# Altium PCB main.PcbDoc
Units mil, origin at the board's own origin, x right, y up, seen from the top; angles counter-clockwise.
Board outline 2150 x 1520 mil, 2 copper layers (Top Layer, Bottom Layer); 42 components, 41 nets, 162 pads, 210 vias.
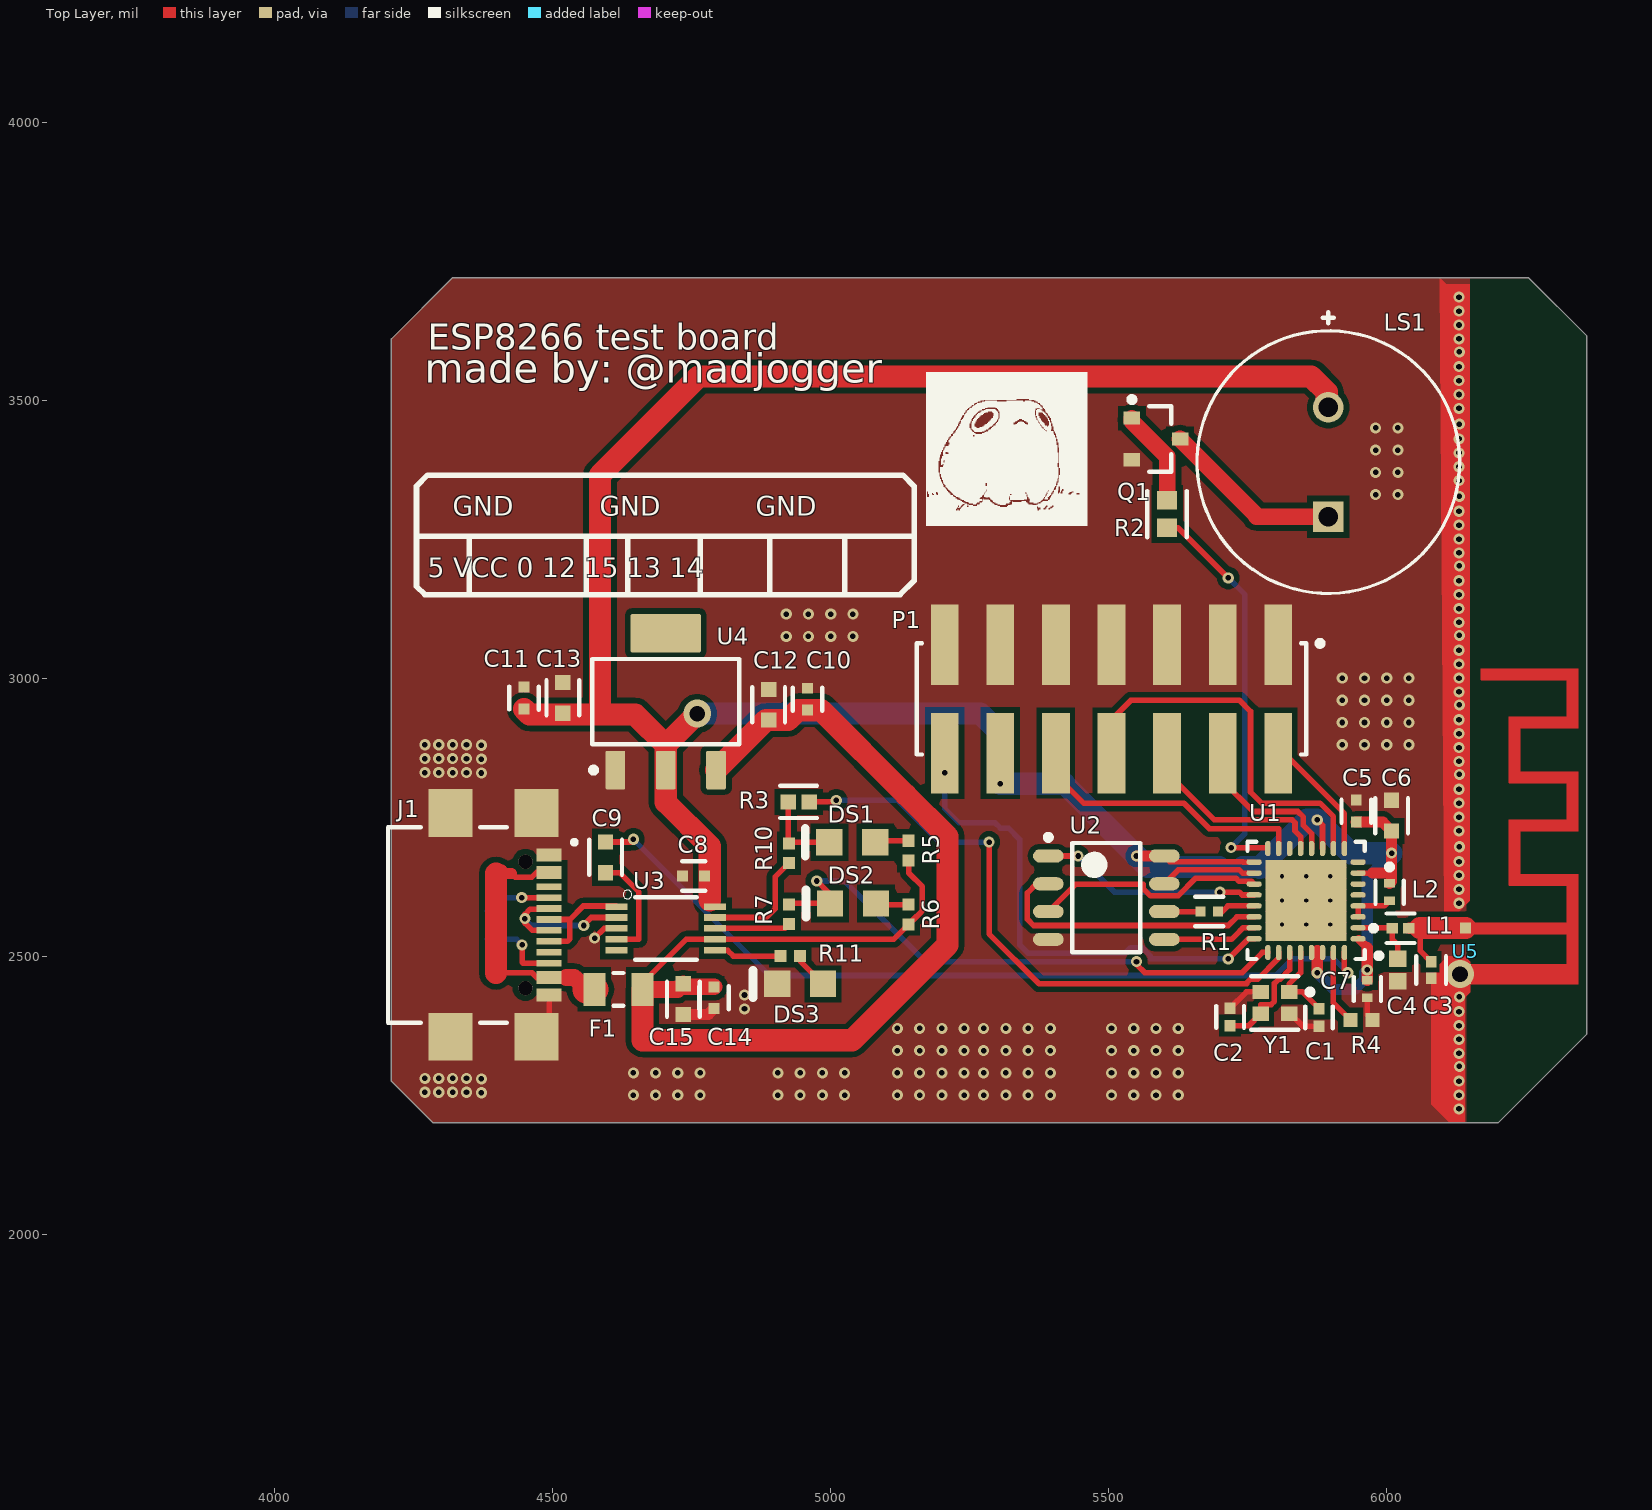
[diagram p0: Top Layer view]
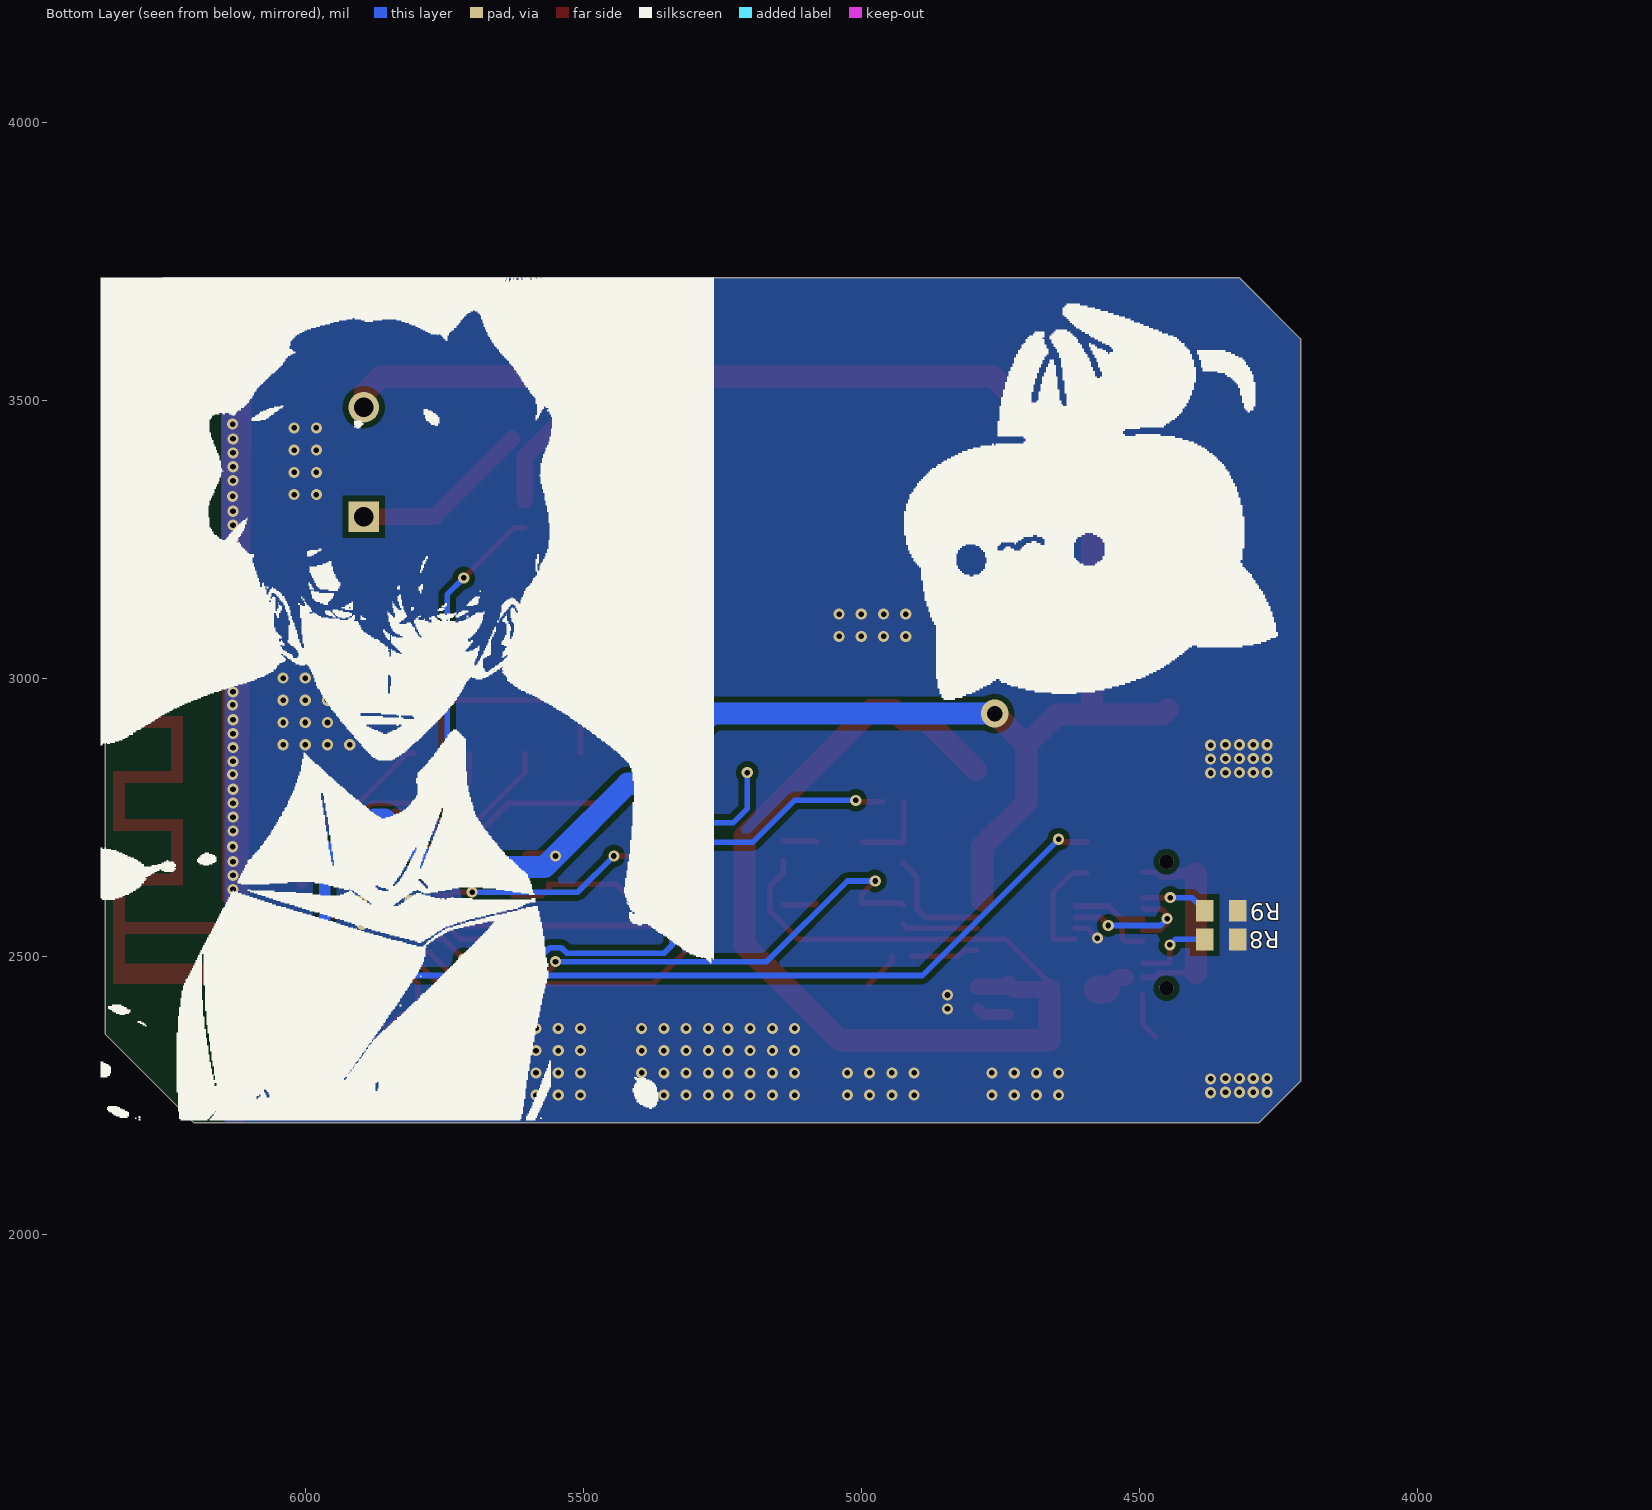
[diagram p1: Bottom Layer view, seen from below]
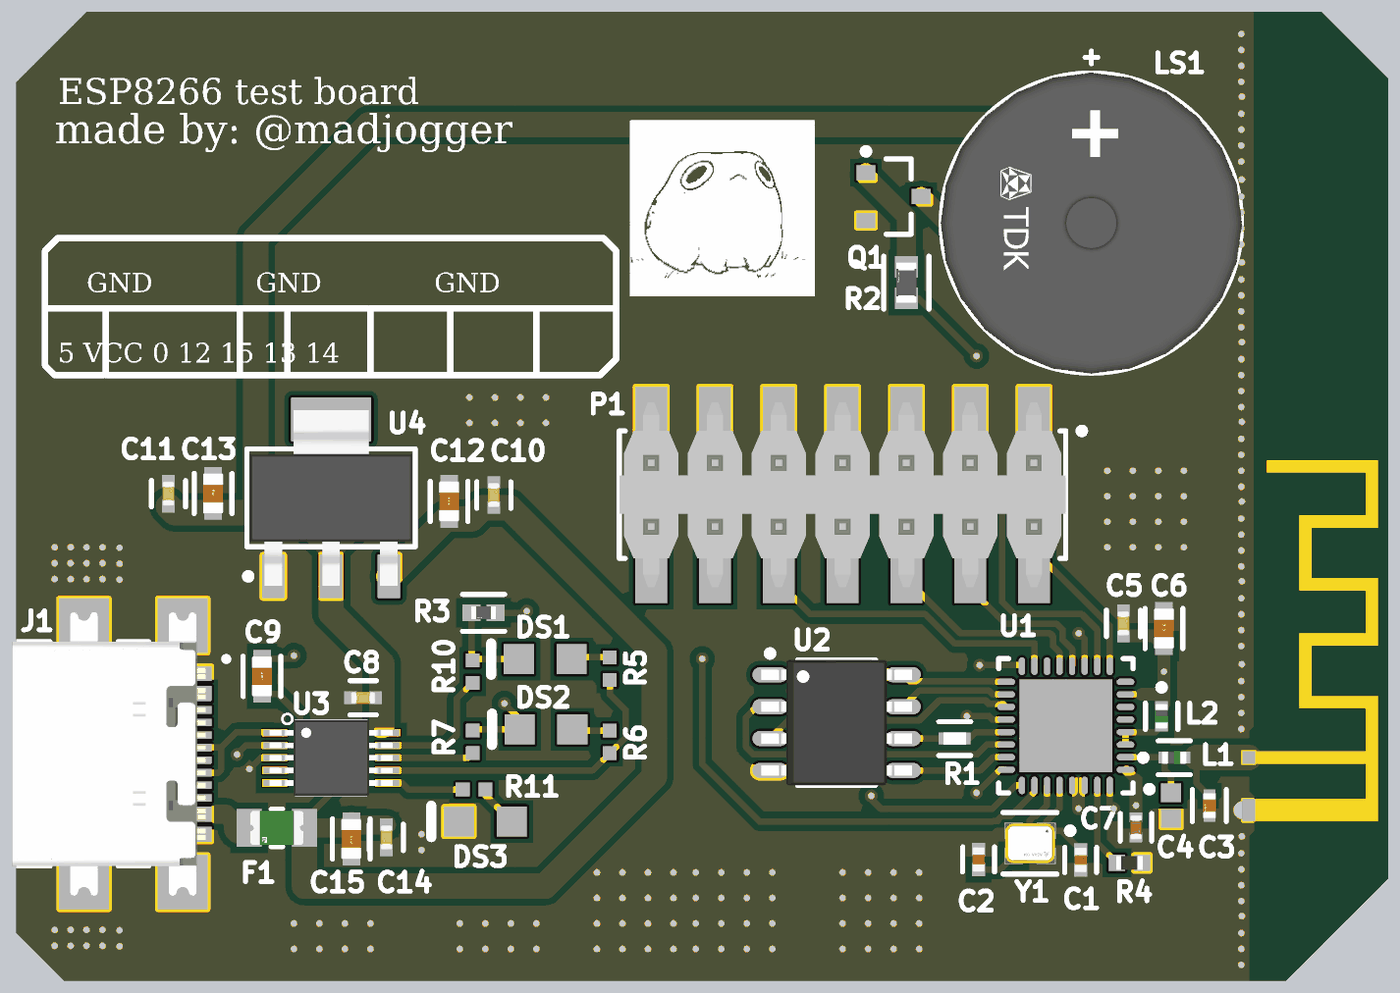
[diagram p2: 3D render of the assembled board from above, using the file's embedded part models]

## Layer stack, top to bottom
Top Solder: solder mask 0.4, Solder Resist, Dk 3.5
Top Layer: signal copper 1.4
Dielectric 1: dielectric 12.6, FR-4, Dk 4.8
Bottom Layer: signal copper 1.4
Bottom Solder: solder mask 0.4, Solder Resist, Dk 3.5

## Board outline
4210,2275 4285,2200 6200,2200 6360,2360 6360,3615 6255,3720 4320,3720 4210,3610

## Design rules (kind name [scope] priority, off if disabled: settings)
Clearance [All] p1: gap=10 ignorepadtopadclearanceinfootprint=FALSE except(5: Arc-Arc Arc-Track Arc-SMDPad Arc-THPad Track-Track Track-SMDPad Track-THPad SMDPad-SMDPad SMDPad-THPad THPad-THPad)
PlaneConnect [All] p1: planeconnectstyle=Direct reliefexpansion=20 reliefentries=4 reliefconductorwidth=10 reliefairgap=10
PolygonConnect [All] p1: connectstyle=Direct reliefconductorwidth=10 reliefentries=4 polygonreliefangle="90 Angle" airgapwidth=10
RoutingVias [All] p1: holewidth=28 width=50 viastyle="Through Hole" minholewidth=8 minwidth=10 maxholewidth=28 maxwidth=50
SolderMaskExpansion [All] p1: expansion=4 istentingtop=FALSE
Width [All] p1: maxlimit=80 minlimit=10 preferedwidth=10
29 further rules are at their usual default settings.

## Components (designator, comment, footprint, x,y, rotation, side; value= is the part's Value field where it differs from the comment)
C1 "C0402C689C5GACTU" FP-C0402-BB-MFG 5878.23,2389.66 r90 top value="6.8 pF"
C2 "C0402C689C5GACTU" FP-C0402-BB-MFG 5718.23,2390.41 r270 top value="6.8 pF"
C3 "GJM1555C1H3R0BB01D" FP-GJM155-0_05-IPC_C 6080,2474.9 r270 top
C4 "2.4pF" CAPC1006X50X20ML10T10 6020,2474.92 r270 top
C5 "CC0402KRX7R9BB104" FP-CC0402-MFG 5945.16,2760.59 r90 top value="100 nF"
C6 "C1608X5R1A106K080AC" FP-C1608-080-0_1-MFG 6008.71,2752.58 r270 top
C7 "GRM155R61A105KE15D" FP-GRM15-0_1-MFG 5965,2440.75 r270 top value=1uF
C8 "CC0402KRX7R9BB104" FP-CC0402-MFG 4753.46,2643.95 r180 top value="100 nF"
C9 "C1608X5R1A106K080AC" FP-C1608-080-0_1-MFG 4595,2677.56 r270 top
C10 "CC0402KRX7R9BB104" FP-CC0402-MFG 4958.31,2961.97 r90 top value="100 nF"
C11 "CC0402KRX7R9BB104" FP-CC0402-MFG 4448.31,2964.1 r90 top value="100 nF"
C12 "C1608X5R1A106K080AC" FP-C1608-080-0_1-MFG 4888.31,2951.97 r270 top
C13 "C1608X5R1A106K080AC" FP-C1608-080-0_1-MFG 4518.31,2964.41 r270 top
C14 "CC0402KRX7R9BB104" FP-CC0402-MFG 4790,2425 r270 top value="100 nF"
C15 "C1608X5R1A106K080AC" FP-C1608-080-0_1-MFG 4735,2422.56 r90 top
DS1 "HSMG-C170" AVAG-HSMX-C170_V 5038.84,2704.65 r180 top
DS2 "HSMG-C170" AVAG-HSMX-C170_V 5040.18,2594.65 r180 top
DS3 "HSMG-C170" AVAG-HSMX-C170_V 4945,2450 r180 top
F1 "0805L050WR" FP-0805L-MFG 4618.31,2440 r180 top value=0.15-0.85Ω
J1 "USB4110GFA" GCT_USB4110GFA 4451.11,2555.94 r270 top
L1 "LQG15HN2N2S02D" FP-LQG15HH_02-IPC_C 6024.9,2550 r0 top
L2 "LQG15HN4N3S02D" FP-LQG15HH_02-MFG 6005,2615 r270 top
LS1 "SD1209T5-A1" FP-SD1209-MFG 5895,3388.43 r90 top
P1 "TSM-107-01-L-DV" SMTC-TSM-107-01-X-DV 5505,2962.44 r180 top
Q1 "BC847C" INF-SOT23_L 5585,3430 r0 top
R1 "CRCW0402200RFKED" FP-CRCW0402-e3-IPC_C 5680.83,2580 r0 top
R2 "ERA-3AEB102V" FP-ERA3A-IPC_C 5605,3295 r90 top
R3 "RC0402FR-07499RL" FP-RC0402-0_4-IPC_A 4942.32,2777.2 r180 top
R4 "ERJ-2RKF1202X" RESC1005X40X25ML05T05 5954.69,2385 r0 top
R5 "1K2" RESC1005X40X25NL05T05 5140.18,2689.65 r270 top
R6 "1K2" RESC1005X40X25NL05T05 5140.18,2574.65 r270 top
R7 "1K2" RESC1005X40X25NL05T05 4925,2575 r90 top
R8 "5K1" RESC1608X55X25ML10T15 4352.68,2530 r180 bottom
R9 "5K1" RESC1608X55X25ML10T15 4352.68,2581.53 r0 bottom
R10 "1K2" RESC1005X40X25NL05T05 4925,2685 r90 top
R11 "1K2" RESC1005X40X25NL05T05 4927.28,2500 r0 top
U1 "ESP8266EX" ESFS-QFN-32_L 5855,2600 r180 top
U2 "M95128-WMN6TP" STM-SO8N-8_V 5495.67,2605 r0 top
U3 "CH340E" MSOP10 4703.58,2549.68 r0 top
U4 "LM1117IMP-3.3/NOPB" DCY0004A_N 4703.31,2957.44 r90 top
U5 "2.4GHZ_ANTENNA" 2.4GHZ_ANTENNA 6271.64,2742.62 r270 top (schematic designator U1)
Y1 "ABM11-26.000MHZ-B7G-T" FP-ABM11-MFG 5798.82,2415.73 r180 top

## Footprints (in the part's own frame and the unit in brackets; to place one, negate y for a bottom-side part, rotate by r counter-clockwise, add the part's x,y. Pads: shape width x height; smd on the part's side, far side on the other; paste and mask are expansions set on the pad)
2.4GHZ_ANTENNA [mil]
  rect 19.68x19.68 smd paste+0 mask+2: ANT(192.32,-130)
  rect 35.43x19.68 smd paste+0 mask+2: GND(275,-130)
  Top Layer region: 202.16,-139.84 202.16,53.07 257.28,53.07 257.28,-139.84 292.71,-139.84 292.71,72.76 95.86,72.76 95.86,-31.18 17.12,-31.18 17.12,72.76 -89.18,72.76 -89.18,-31.18 -167.92,-31.18 -167.92,72.76 -274.21,72.76 -274.21,-102.04 -254.53,-102.04 -254.53,53.07 -187.6,53.07 -187.6,-50.86 -69.49,-50.86 -69.49,53.07 -2.56,53.07 -2.56,-50.86 115.55,-50.86 115.55,53.07 182.48,53.07 182.48,-139.84
  Top Layer lines w0.1: 292.71,-139.84 257.28,-139.84 257.28,53.07 202.16,53.07 202.16,-139.84 182.48,-139.84 182.48,53.07 115.55,53.07 115.55,-50.86 -2.56,-50.86 -2.56,53.07 -69.49,53.07 -69.49,-50.86 -187.6,-50.86 -187.6,53.07 -254.53,53.07 -254.53,-102.04 -274.21,-102.04 -274.21,72.76 -167.92,72.76 -167.92,-31.18 -89.18,-31.18 -89.18,72.76 17.12,72.76 17.12,-31.18 95.86,-31.18 95.86,72.76 292.71,72.76 292.71,-139.84
AVAG-HSMX-C170_V [mm] "SMD, 2-Leads, Body 2x1.25mm, Height 0.8mm"
  rect 1.2x1.2 smd: 1(-1.05,0) 2(1.05,0)
  silkscreen extent 2.15,-0.63 2.15,0.63, body extent -1,-0.63 1,0.63, height 0.8
CAPC1006X50X20ML10T10 [mm] "Chip Capacitor, 2-Leads, Body 1.00x0.55mm, IPC Low Density"
  rect 0.74x0.8 smd: 1(-0.51,0) 2(0.51,0)
  body extent -0.55,-0.33 0.55,0.32, height 0.5
DCY0004A_N [mm] "SOT223, 4-Leads, Body 6.7x3.7mm, Pitch 2.3mm, IPC Medium Density"
  rrect11% 1.75x0.9 smd: 1(-3.125,2.3) 2(-3.125,0) 3(-3.125,-2.3)
  rrect6% 1.75x3.2 smd: 4(3.125,0)
  silkscreen extent -3.25,-3.35 1.95,3.42, body extent -3.5,-3.25 3.5,3.25, height 1.62
ESFS-QFN-32_L [mm] "QFN, 32-Leads, Body 5.05x5.05mm, Pitch 0.50mm, Thermal Pad 3.70x3.70mm, IPC High Density"
  oval 0.7x0.25 smd: 1(-2.375,1.75) 2(-2.375,1.25) 3(-2.375,0.75) 4(-2.375,0.25) 5(-2.375,-0.25) 6(-2.375,-0.75) 7(-2.375,-1.25) 8(-2.375,-1.75) 17(2.375,-1.75) 18(2.375,-1.25) 19(2.375,-0.75) 20(2.375,-0.25) 21(2.375,0.25) 22(2.375,0.75) 23(2.375,1.25) 24(2.375,1.75)
  oval 0.25x0.7 smd: 9(-1.75,-2.375) 10(-1.25,-2.375) 11(-0.75,-2.375) 12(-0.25,-2.375) 13(0.25,-2.375) 14(0.75,-2.375) 15(1.25,-2.375) 16(1.75,-2.375) 25(1.75,2.375) 26(1.25,2.375) 27(0.75,2.375) 28(0.25,2.375) 29(-0.25,2.375) 30(-0.75,2.375) 31(-1.25,2.375) 32(-1.75,2.375)
  rect 3.7x3.7 smd: 33(0,0)
  silkscreen extent -3.45,-2.67 2.68,2.68, body extent -2.52,-2.52 2.53,2.53, height 0.9
FP-0805L-MFG [mm]
  rect 1x1.5 smd paste+0 mask+0: 1(-1.1,0) 2(1.1,0)
  silkscreen extent -0.23,-0.75 0.23,0.75, body extent -1.7,-0.85 1.7,0.85, height 0.25
FP-ABM11-MFG [mm]
  rect 0.75x0.65 smd paste+0 mask+0: 1(-0.65,-0.5) 2(0.65,-0.5) 3(0.65,0.5) 4(-0.65,0.5)
  silkscreen extent -1.73,-1.22 1.07,1.22, body extent -1.17,-0.97 1.17,0.97, height 0.25
FP-C0402-BB-MFG [mm]
  rect 0.52x0.52 smd paste+0 mask+0: 1(-0.4,0) 2(0.4,0)
  silkscreen extent -0.5,-0.64 0.5,0.64, body extent -0.8,-0.4 0.8,0.4, height 0.25
FP-C1608-080-0_1-MFG [mm]
  rect 0.7x0.7 smd paste+0 mask+0: 1(-0.7,0) 2(0.7,0)
  silkscreen extent -0.8,-0.75 0.8,0.75, body extent -1.15,-0.55 1.15,0.55, height 0.25
FP-CC0402-MFG [mm]
  rect 0.5x0.5 smd paste+0 mask+0: 1(-0.5,0) 2(0.5,0)
  silkscreen extent -0.53,-0.68 0.53,0.67, body extent -0.87,-0.48 0.87,0.48, height 0.25
FP-CRCW0402-e3-IPC_C [mil]
  rect 18.43x18.6 smd paste+0 mask+0: 1(-15.83,0) 2(15.83,0)
  silkscreen extent -25,-27 25,27, body extent -29,-15 29,15, height 10
FP-ERA3A-IPC_C [mil]
  rect 33.66x35.68 smd paste+0 mask+0: 1(-24.63,0) 2(24.63,0)
  silkscreen extent -41,-35 41,35, body extent -45,-24 45,24, height 10
FP-GJM155-0_05-IPC_C [mil]
  rect 20.29x18.6 smd paste+0 mask+0: 1(-14.9,0) 2(14.9,0)
  silkscreen extent -25,-27 25,27, body extent -29,-15 29,15, height 10
FP-GRM15-0_1-MFG [mm]
  rect 0.4x0.5 smd paste+0 mask+0: 1(-0.4,0) 2(0.4,0)
  silkscreen extent -0.55,-0.63 0.55,0.63, body extent -0.7,-0.38 0.7,0.38, height 0.25
FP-LQG15HH_02-IPC_C [mil]
  rect 20.29x18.6 smd paste+0 mask+0: 1(-14.9,0) 2(14.9,0)
  silkscreen extent -54,-27 25,27, body extent -29,-15 29,15, height 10
FP-LQG15HH_02-MFG [mm]
  rect 0.4x0.5 smd paste+0 mask+0: 1(-0.4,0) 2(0.4,0)
  silkscreen extent -1.27,-0.64 0.53,0.65, body extent -0.7,-0.38 0.7,0.38, height 0.25
FP-RC0402-0_4-IPC_A [mil]
  rect 28.16x26.48 smd paste+0 mask+0: 1(-18.84,0) 2(18.84,0)
  silkscreen extent -33,-29 33,29, body extent -41,-21 41,21, height 10
FP-SD1209-MFG [mm]
  rect 1.4x1.4 hole 0.9 paste-2539.97 mask+0: 1(-2.5,0)
  round 1.4 hole 0.9 paste-2539.97 mask+0: 2(2.5,0)
  silkscreen extent -6,-6 6.85,6, body extent -6.1,-6.1 6.1,6.1, height 0.25
GCT_USB4110GFA [mm]
  rect 0.6x1.15 smd: A1/B12(-3.2,1.075) A4/B9(-2.4,1.075) B1/A12(3.2,1.075) B4/A9(2.4,1.075)
  rect 0.3x1.15 smd: A5(-1.25,1.075) A6(-0.25,1.075) A7(0.25,1.075) A8(1.25,1.075) B5(1.75,1.075) B6(0.75,1.075) B7(-0.75,1.075) B8(-1.75,1.075)
  rect 2.18x2 smd: S1(-5.11,0.5) S2(5.11,0.5) S3(-5.11,-3.43) S4(5.11,-3.43)
  round 0.65 hole 0.65 unplated: ""(-2.89,0) ""(2.89,0)
  silkscreen extent -4.47,-6.28 4.47,2.33, body extent -5.65,-6.28 5.65,1.42, height 3.26
INF-SOT23_L [mm] "SOT23, 3-Leads, Body 2.9x1.3 mm, Pitch 0.95 mm, IPC High Density"
  rect 0.75x0.6 smd: 1(-1.1,0.95) 2(-1.1,-0.95) 3(1.1,0)
  silkscreen extent -1.22,-1.5 0.7,1.92, body extent -0.7,-1.5 0.7,1.5, height 1.1
MSOP10 [mm]
  rect 1x0.3 smd paste-1 mask+0.05: 1(-2.25,1) 2(-2.25,0.5) 3(-2.25,0) 4(-2.25,-0.5) 5(-2.25,-1) 6(2.25,-1) 7(2.25,-0.5) 8(2.25,0) 9(2.25,0.5) 10(2.25,1)
  silkscreen extent -1.95,-1.43 1.4,1.75, body extent -2.45,-1.5 2.45,1.5, height 1
RESC1005X40X25ML05T05 [mm] "Chip Resistor, 2-Leads, Body 1.05x0.55mm, IPC Low Density"
  rect 0.65x0.65 smd: 1(-0.5,0) 2(0.5,0)
  body extent -0.53,-0.28 0.53,0.28, height 0.4
RESC1005X40X25NL05T05 [mm] "Chip Resistor, 2-Leads, Body 1.00x0.50mm, IPC Medium Density"
  rect 0.55x0.55 smd: 1(-0.45,0) 2(0.45,0)
  body extent -0.53,-0.27 0.53,0.28, height 0.4
RESC1608X55X25ML10T15 [mm] "Chip Resistor, 2-Leads, Body 1.60x0.80mm, IPC Low Density"
  rect 0.8x1 smd: 1(-0.75,0) 2(0.75,0)
  body extent -0.85,-0.45 0.85,0.45, height 0.55
SMTC-TSM-107-01-X-DV [mm] "Double Row Gullwing ASM, 2x7 Pins, Vertical, 2.54mm Pitch, Male"
  rect 1.27x3.68 smd: 1(-7.62,-2.475) 2(-7.62,2.475) 3(-5.08,-2.475) 4(-5.08,2.475) 5(-2.54,-2.475) 6(-2.54,2.475) 7(0,-2.475) 8(0,2.475) 9(2.54,-2.475) 10(2.54,2.475) 11(5.08,-2.475) 12(5.08,2.475) 13(7.62,-2.475) 14(7.62,2.475)
  silkscreen extent -9.65,-2.66 8.89,2.54, body extent -8.89,-3.68 8.89,3.68, height 9.65
STM-SO8N-8_V [mm] "SOIC, 8-Leads, Body 5x4mm, Pitch 1.27mm"
  oval 1.4x0.6 smd: 1(-2.65,1.905) 2(-2.65,0.635) 3(-2.65,-0.635) 4(-2.65,-1.905) 5(2.65,-1.905) 6(2.65,-0.635) 7(2.65,0.635) 8(2.65,1.905)
  silkscreen extent -2.77,-2.5 1.55,2.88, body extent -3,-2.5 3,2.5, height 1.75

## Part data
C1 C2: library part CMP-1034-00517-3, "CAP CER 6.8PF 50V NP0 0402", Capacitance="6.8 pF", Manufacturer=Kemet, Package=C0402-BB, Temperature="-55°C to +125°C", Temperature Characteristic=C0G, Temperature Coefficient=15%, Temperature Range High=+125°C, Temperature Range Low=-55°C, Tolerance="0.25 pF", Voltage Rating="50 V", Automotive=No, Category=Cap, ComponentLink2Description=Datasheet, ComponentLink2URL=https://content.kemet.com/datasheets/KEM_C1002_X7R_SMD.pdf, Device Class L1="Passive Components", Device Class L2=Capacitors, Device Class L3="Ceramic Capacitors", Digikey Description="CAP CER 6.8PF 50V NP0 0402", Height=0.55mm, Ipc Land Pattern Name=CAPC10050X50, Lead Free=Yes, Manufacturer Part Number=C0402C689C5GACTU, Material=Ceramic, Mouser Description="Cap Ceramic 6.8pF 50V C0G 0.25pF SMD 0402 125°C Paper T/R", Octopart=https://octopart.com/c0402c689c5gactu-kemet-9143567, RoHS=TRUE
C3: library part CMP-2008-03843-2, "Multi-Layer Ceramic Capacitor 3pF C0G  ±0.1pF 0402 Paper T/R", Capacitance=3pF, Case Code (Imperial)=0402, Case Code (Metric)=1005, Dielectric=C0G, Max Operating Temperature=125°C, Min Operating Temperature=-55°C, Package Quantity=1, Voltage=50V, Case/Package=0402, Depth=0.5mm, Height=0.5mm, Lead Free="Lead Free", Length=1mm, Mount="Surface Mount", Packaging="Tape and Reel", Radiation Hardening=No, REACH SVHC="No SVHC", Termination=SMD/SMT, Thickness=0.022inch, Voltage Rating=50V, Voltage Rating (DC)=50V, Width=0.02inch
C4: library part CMP-2008-04784-1, Manufacturer="AVX Interconnect / Elco", Part Number=04023J2R4BBSTR
C5 C8 C10 C11 C14: library part CMP-03422-001010-1, "CAP CER 0.1UF 50V X7R 0402", Capacitance="100 nF", Manufacturer=YAGEO, Package=CC0402, Temperature="-55°C to +125°C", Temperature Characteristic=X7R, Temperature Coefficient=30ppm/°C, Temperature Range High=+125°C, Temperature Range Low=-55°C, Tolerance=0.1, Voltage Rating="50 V", Automotive=No, Automotive Grade=NA, Category=Cap, ComponentLink2Description=Datasheet, ComponentLink2URL=http://www.yageo.com/documents/recent/UPY-GP_NP0_16V-to-50V_16.pdf, Device Class L1="Passive Components", Device Class L2=Capacitors, Device Class L3="Ceramic Capacitors", Digikey Description="CAP CER 0.1UF 50V X7R 0402", Footprint Url=http://www.yageo.com/exep/pages/download/literatures/UPY-C_GEN_24.pdf, Height=0.55mm, Ipc Land Pattern Name=CAPC10050X50, Lead Free=Yes, Manufacturer Part Number=CC0402KRX7R9BB104, Material=Ceramic, Octopart=https://octopart.com/cc0402krx7r9bb104-yageo-56536067, RoHS=TRUE
C6 C9 C12 C13 C15: library part CMP-2000-04979-3, "Multilayer Ceramic Capacitors 10μF ±10% 10V X5R SMD 0603", Capacitance=10uF, Case Code (Imperial)=0603, Case Code (Metric)=1608, Dielectric=X5R, Dielectric Material=Ceramic, Max Operating Temperature=85°C, Min Operating Temperature=-55°C, Package Quantity=1, Tolerance=10%, Voltage=10V, Case/Package=0603, Construction=Flat, Depth=0.8mm, Height=0.8mm, Lead Free="Lead Free", Length=1.6mm, Mount="Surface Mount", Number of Pins=2, Packaging="Tape and Reel", Radiation Hardening=No, REACH SVHC="No SVHC", Resistor Type=Ceramic, RoHS Compliant=Yes, Series=C, Termination=SMD/SMT, Thickness=0.035inch, Voltage Rating=10V, Voltage Rating (DC)=10V, Weight=7.1E-05oz, Width=0.8mm
C7: library part CMP-2008-04556-2, "CAP CER 1UF 10V X5R 0402", Capacitance=1uF, Manufacturer=Murata, Package=GRM15-0.1, Temperature="-55°C to +85°C", Temperature Characteristic=X5R, Temperature Coefficient=15%, Temperature Range High=+85°C, Temperature Range Low=-55°C, Tolerance=10%, Voltage Rating=10V, Automotive=No, Category=Cap, ComponentLink2Description=Datasheet, ComponentLink2URL=https://search.murata.co.jp/Ceramy/image/img/A01X/G101/ENG/GRM155R61A105KE15-01A.pdf, Device Class L1="Passive Components", Device Class L2=Capacitors, Device Class L3="Ceramic Capacitors", Digikey Description="CAP CER 1UF 10V X5R 0402", Height=0.55mm, Ipc Land Pattern Name=CAPC10050X50, Lead Free=Yes, Manufacturer Part Number=GRM155R61A105KE15D, Material=Ceramic, Mouser Description="0402 1 uF 10 V ±10% Tolerance X5R Surface Mount Multilayer Ceramic Capacitor", Octopart=https://octopart.com/grm155r61a105ke15d-murata-197442, RoHS=TRUE
DS1 DS2 DS3: library part CMP-2000-05062-1, "Chip LED, Green, 2.2 V, -40 to 85 degC, 2-Pin SMD, Pb-Free, Tape and Reel", Forward Current If=20mA, Forward Voltage=2.2V, Forward Voltage VF Max=2.6V, LED Colour=Green, Manufacturer=Avago, Operating Temperature Max=85degC, Operating Temperature Min=-30degC, Operating Temperature Range=-30degCto+85degC, Opto Case Style=SMD, Package Description="2-Pin Surface Mount Device, Body 2 x 1.25 mm, Height 0.8 mm", Package Reference=HSMX-C170, Storage Temperature Min=-40degC, Bulb Size=1.25mmx1.4mm, Datasheet URL=https://datasheet.ciiva.com/29280/180495-da-01-en-chip-led-hsmg-c170-gelb-gruen-29280971.pdf, Datasheet Version=Oct-08, Dominant Wavelength=572nm, Dominant Wavelength Typ=572nm, External Depth=0.8mm, External Length / Height=2mm, External Width=1.25mm, Forward Current If Max=20mA, LED Mounting=SMD, LED Type=Standard, Lens Shape=Rectangular, Light Area Height=1mm, Luminous Intensity=15mcd, Luminous Intensity Min=4mcd, Luminous Intensity Typ=15mcd, Manufacturer URL=http://www.avagotech.com/, Mounting Type=SMD, MSL=MSL2A-4weeks, No. of Pins=2, Opto Mounting Orientation=Top, Packaging=CutTape, Peak Forward Current=20mA, Peak Wavelength=570nm, PIV Max=5V, Storage Temperature Max=85degC, SVHC=NoSVHC(16-Jun-2014), Viewing Angle=170deg, Voltage Vf Typ=2.2V, Wavelength Typ=570nm
F1: library part CMP-08606-000023-1, "PTC RESET FUSE 6V 500MA 0805", Ambient Temperature Range High=+85°C, Ambient Temperature Range Low=-40°C, Current Rating=100A, Hold Current=0.5A, Manufacturer="Littelfuse Inc.", Package=0805L, Resistance=0.15-0.85Ω, Temperature="-40°C to +85°C", Trip Current=1A, Voltage Rating=6V, Automotive=No, Category=Fuse, ComponentLink2Description=Datasheet, ComponentLink2URL=https://www.littelfuse.com/~/media/electronics/datasheets/resettable_ptcs/littelfuse_ptc_0805l_datasheet.pdf.pdf, Device Class L1="Circuit Protection", Device Class L2="PTC Resettable Fuses", Device Class L3=unset, Digikey Description="PTC RESET FUSE 6V 500MA 0805", Height=1.25mm, Lead Free=Yes, Manufacturer Part Number=0805L050WR, Mouser Description="PTC Resettable Fuse 0.5A(hold) 1A(trip) 6VDC 100A 0.5W 0.1s 0.15Ohm SMD Solder Pad 0805 T/R", Octopart=https://octopart.com/0805l050wr-littelfuse-673858, RoHS=TRUE, Temperature Range High=+85°C, Temperature Range Low=-40°C, Trip Time=0.1s
J1: "0PCS TYPE-C-04 / https://aliexpress.ru/item/1005005371954812.html?sku_id=12000032786473722&spm=a2g2w.productlist.search_results.6.6aa66f78vHu0s1", Package=None, Check_prices=https://www.snapeda.com/parts/USB4110GFA/Global+Connector+Technology/view-part/?ref=eda, MF="Global Connector Technology", MP=USB4110GFA, SnapEDA_Link=https://www.snapeda.com/parts/USB4110GFA/Global+Connector+Technology/view-part/?ref=snap
L1: library part CMP-1662-00024-2, "Multilayer type RF Inductor 2.2nH ±0.3nH 0.09Ω 900mA 0402", Case Code (Imperial)=0402, Case Code (Metric)=1005, Current Rating=300mA, DC Resistance (DCR)=150mR, Inductance=2.2nH, Max Operating Temperature=125°C, Min Operating Temperature=-55°C, Package Quantity=10000, Self Resonant Frequency=6GHz, Test Frequency=100MHz, Case/Package=0402, Core Material=Air, DC Current=300mA, Depth=0.55mm, Height=0.02inch, Height - Seated (Max)=0.022inch, Lead Free="Lead Free", Length=1mm, Max DC Current=300mA, Military Standard=Not, Mount="Surface Mount", Number of Pins=2, Packaging="Tape and Reel", Q Factor=8, Radiation Hardening=No, REACH SVHC="No SVHC", Shielding=Unshielded, Termination=SMD/SMT, Width=0.02inch
L2: library part CMP-06042-008580-1, "Multilayer type RF Inductor 4.3nH ±0.3nH 0.15Ω 700mA 0402", Case Code (Imperial)=0402, Case Code (Metric)=1005, Current=300mA, DC Resistance (DCR)=210mR, Inductance=4.3nH, Max Operating Temperature=125°C, Min Operating Temperature=-55°C, Package Quantity=10000, Self Resonant Frequency=6GHz, Test Frequency=100MHz, Case/Package=0402, Core Material=Air, Current Rating=300mA, DC Current=300mA, Depth=0.55mm, Height=0.5mm, Height - Seated (Max)=0.022inch, Lead Free="Lead Free", Length=1.05mm, Max DC Current=300mA, Military Standard=Not, Mount="Surface Mount", Packaging="Tape and Reel", Q Factor=8, Radiation Hardening=No, REACH SVHC="No SVHC", Shielding=Unshielded, Termination=SMD/SMT, Width=0.02inch
LS1: library part CMP-08413-000009-1, "AUDIO MAGNETIC XDCR 3-6V TH", Current Rating=60mA, Frequency=2.048kHz, Max Operating Temperature=85°C, Min Operating Temperature=-40°C, Operating Supply Voltage=5V, Package Quantity=100, Self Resonant Frequency=2.05kHz, Diameter=12mm, Height=9mm, Lead Free="Lead Free", Max Supply Current=60mA, Mount="Through Hole", Number of Pins=2, Number of Terminals/Pins=2, Operating Supply Current=60mA, Packaging=Tray, Sensing Method=Magnetic, Series=SD, Termination="PC Pins", Voltage Rating (DC)=5V, Washable=No
P1: library part CMP-1024-00260-1, "0.025\" SQ Post Header, Surface Mount, Vertical, -55 to 125 degC, 2.54 mm Pitch, 14-Pin, Male, RoHS", Manufacturer=Samtec, Temperature Range="-55 to 125 degC", ComponentLink1Description="Manufacturer URL", ComponentLink1URL=http://www.samtec.com, ComponentLink2Description=Datasheet, ComponentLink2URL=http://www.samtec.com/documents/webfiles/pdf/TSM.PDF, ComponentLink3Description="Package Specification", ComponentLink3URL=http://www.samtec.com/documents/webfiles/cpdf/TSM-1XX-XX-XXX-XX-X-XXX-X-MKT.pdf, DatasheetVersion=F-214, Mounting Technology="Surface Mount", Orientation=Vertical, PackageDescription="Double Row Gullwing ASM", PackageReference=TSM-107-01-X-DV, PackageVersion="DJ, 4/1991", PartNumber=TSM-107-01-L-DV, Pitch="2.54 mm", RoHS=True
Q1: library part CMP-1177-00037-1, "NPN Silicon AF Transistor, 45 V VCEO, 100 mA IC, SOT23, Reel, Green", Manufacturer=Infineon, ComponentLink1Description="Manufacturer URL", ComponentLink1URL=http://www.infineon.com/, ComponentLink2Description=Datasheet, ComponentLink2URL=http://www.infineon.com/dgdl/bc847series_bc848series_bc849series_bc850series.pdf?folderId=db3a304314dca389011541d30fa21656&fileId=db3a304314dca389011541d4630a1657, ComponentLink3Description="Package Specification", ComponentLink3URL=http://www.infineon.com/dgdl/SOT23-Package_Overview.pdf?folderId=db3a30431936bc4b0119532290053c66&fileId=db3a30431936bc4b0119533468123c85, fT (typ)="250Â MHz", Green=TRUE, IBM (max)="200Â mA", IC (max)="100Â mA", ICBO (max)="15Â nA", ICM (max)="200Â mA", Mounting Technology="Surface Mount", PackageDescription="3-Pin Small Outline Transistor Package, 1.3 x 2.9 mm Body, 0.95 mm Pitch", PackageReference=SOT23, PackageVersion=Apr-08, Packing=Reel, PartNumber=BC847C, Polarity=NPN, Ptot (max)="330Â mW", VCBO (max)="50Â V", VCEO (max)="45Â V", VEBO (max)="6Â V"
R1: library part CMP-1011-00429-3, "RES Thick Film, 200Ω, 1%, 0.063W, 100ppm/°C, 0402", Case Code (Imperial)=0402, Case Code (Metric)=1005, Max Operating Temperature=155°C, Max Power Dissipation=63mW, Min Operating Temperature=-55°C, Package Quantity=10, Resistance=200R, Temperature Coefficient=100ppm/°C, Tolerance=1%, Voltage Rating=50V, Case/Package=0402, Composition="Thick Film", Contact Plating=Tin, Depth=0.5mm, Features="Automotive AEC-Q200", Height=0.35mm, Lead Free="Lead Free", Length=1mm, Military Standard=Not, Mount="Surface Mount", Number of Pins=2, Number of Terminations=2, Packaging="Tape and Reel", Power Rating=63mW, Radiation Hardening=No, Termination=SMD/SMT, Voltage Rating (DC)=50V, Weight=2.3E-05oz, Width=0.5mm
R2: library part CMP-2000-00873-2, "RES SMD 1K OHM 0.1% 1/10W 0603", Case Code (Imperial)=0603, Case Code (Metric)=1608, Max Operating Temperature=155°C, Max Power Dissipation=100mW, Min Operating Temperature=-55°C, Package Quantity=5000, Resistance=1kR, Resistance Tolerance=0.1%, Resistor Type="Thin Film", Temperature Coefficient=25ppm/°C, Voltage Rating=75V, Case/Package=0603, Construction=Rectangular, Contact Plating=Tin, Depth=0.8mm, Height=0.45mm, Length=1.6mm, Military Standard=Not, Mount="Surface Mount", Number of Pins=2, Number of Terminations=2, Packaging="Tape and Reel", Power Rating=100mW, Radiation Hardening=No, REACH SVHC="No SVHC", RoHS Compliant=Yes, Series=ERA-3A, Size Code=0603, Technology="METAL FILM", Termination=SMD/SMT, Tolerance=0.1%, Width=0.8mm
R3: library part CMP-2002-07708-2, "RES 499 OHM 1% 1/16W 0402", Case Code (Imperial)=0402, Case Code (Metric)=1005, Max Operating Temperature=155°C, Max Power Dissipation=63mW, Min Operating Temperature=-55°C, Package Quantity=1, Power Rating=62.5mW, Resistance=499R, Resistance Tolerance=1%, Resistor Type="Thick Film", Temperature Coefficient=100ppm/°C, Voltage Rating=50V, Case/Package=0402, Construction=Rectangular, Depth=0.5mm, Features="Moisture Resistant", Height=0.016inch, Lead Free="Lead Free", Length=0.039inch, Military Standard=Not, Number of Terminations=2, Packaging="Tape and Reel", REACH SVHC="No SVHC", RoHS Compliant=Yes, Series=RC, Size Code=0402, Termination=SMD/SMT, Tolerance=1%, Voltage Rating (DC)=50V, Width=0.02inch
R4: library part CMP-2002-00646-4, "Chip Resistor, 12 KOhm, +/- 1%, 0.1 W, -55 to 155 degC, 0402 (1005 Metric), RoHS, Tape and Reel", Case Code (Imperial)=0402, Case Code (Metric)=1005, Max Operating Temperature="155 degC", Min Operating Temperature="-55 degC", Package Quantity=10000, Power Rating="100 mW", Resistance="12 KOhm", Tolerance=1%, Voltage Rating="50 V", Case\/Package=0402, ComponentLink1Description="Manufacturer URL", ComponentLink1URL=http://www.panasonic.com/, ComponentLink2Description=Datasheet, ComponentLink2URL=http://industrial.panasonic.com/cdbs/www-data/pdf/RDA0000/AOA0000C86.pdf, DatasheetVersion=04/2015, Height="0.35 mm", Length="1 mm", Mount="Surface Mount", Mounting Technology="Surface Mount", PackageDescription="2-Pin Surface Mount Device, Body 1 x 0.5 mm", PackageReference=0402, Packaging="Tape and Reel", PartNumber=ERJ-2RKF1202X, Pins=2, REACH SVHC=Yes, RoHSCompliant=true, Width="0.5 mm"
R5 R6 R7 R10 R11: library part CMP-2002-08284-1, Manufacturer="Vishay Dale", Part Number=CRCW04021K20FKED
R8 R9: library part CMP-2000-04091-1, Manufacturer=Yageo, Part Number=RC0603FR-075K1L
U1: library part CMP-2000-07453-1, "Low-Power, Highly-Integrated Wi-Fi Solution, 2.5 to 3.6 V, 80 mA, -40 to 125 degC, 32-Pin QFN", Manufacturer="Espressif Systems", Package Description="32-Pin Quad Falt No-Lead, Body 5 x 5 mm, Pitch 0.5 mm", Package Reference=QFN-32, Datasheet URL=http://espressif.com/sites/default/files/documentation/0a-esp8266ex_datasheet_en.pdf, Datasheet Version="Rev. 5.4, 04/2017", Manufacturer URL=http://espressif.com, Mounting Technology=SurfaceMount
U2: library part CMP-2000-06648-1, "SPI Bus EEPROM with High-Speed Clock, 128 Kbit, 2.5 to 5.5 V, -40 to 85 degC, 8-Pin SOIC, RoHS, Tape and Reel", Frequency=5MHz, Manufacturer=STMicroelectronics, Operating Supply Voltage (Max)=5.5V, Operating Supply Voltage (Min)=2.5V, Operating Supply Voltage (Typ)=3.3/5V, Operating Temp Range=-40Cto85C, Operating Temperature (Max)=85C, Operating Temperature (Min)=-40C, Operating Temperature Classification=Industrial, Package Description="8-Pin Small Outline Integrated Circuit, Body 4.9 x 3.9 mm, Pitch 1.27 mm", Package Reference=SO8N, Package Type=SON, Supply Current=5mA, Access Time (Max)=60ns, Data Retention=200, Datasheet URL=http://www.st.com/content/ccc/resource/technical/document/datasheet/11/47/cf/4a/88/23/42/87/CD00001441.pdf/files/CD00001441.pdf/jcr:content/translations/en.CD00001441.pdf, Datasheet Version="Rev. 17 , 05/2015", Density=131072Bit, Interface Type=Serial(SPI), Manufacturer URL=http://www.st.com/, Mounting=SurfaceMount, Mounting Technology=SurfaceMount, Organization=16Kx8, Packaging=TapeandReel, Pin Count=8, Programmable=Yes, Rad Hardened=No, Write Protection=Yes
U3: "USB to serial chip CH340", Package=Package, Check_prices=https://www.snapeda.com/parts/CH340E/WCH/view-part/?ref=eda, MF=WCH, MP=CH340E, SnapEDA_Link=https://www.snapeda.com/parts/CH340E/WCH/view-part/?ref=snap
U4: library part CMP-0062-01631-4, "800mA Low-Dropout Linear Regulator, 4-pin SOT-223, Pb-Free", Manufacturer="Texas Instruments", PackageTopMarking=XYTT*N05B, PowerWise=N, Code_IPC=SOT223-4, Code_JEDEC=TO-261-AA, ComponentLink1Description="Datasheet URL", ComponentLink1URL=http://www.ti.com/general/docs/lit/getliterature.tsp?genericPartNumber=LM1117-N&fileType=pdf, CompType="LDO IC", High-Reliability=Y, PackageDescription="Molded SOT-223, 6.50 x 3.56 x 1.6mm Body, 4 Lead, 2.3mm Pitch", PackageReference=DCY0004A, PartNumber=LM1117IMP-3.3/NOPB, PinCount=4, RoHS=Y
Y1: library part CMP-27762-005749-1, "Crystal 26MHz ±15ppm 10pF SMD-4 2mm x 1.6mm", Case/Package=CSMD, ESR (Equivalent Series Resistance)=100R, Frequency=26MHz, Frequency Stability=15ppm, Load Capacitance=10pF, Max Operating Temperature=70°C, Min Operating Temperature=-20°C, Operating Frequency="26 MHz", Package Quantity=1000, Depth=1.6mm, Frequency Tolerance=15ppm, Height=0.023inch, Lead Free="Lead Free", Length=2mm, Mount="Surface Mount", Number of Pins=4, Packaging="Tape and Reel", REACH SVHC="No SVHC", Series=ABM11, Series Resistance=100R, Termination=SMD/SMT, Tolerance=15ppm, Width=0.063inch

## Via types
v1: diameter 20, hole 10, Top Layer to Bottom Layer, tented both sides, 199 vias
v2: diameter 19.68, hole 7.87, Top Layer to Bottom Layer, 9 vias
v3: diameter 50, hole 28, Top Layer to Bottom Layer, tented both sides, 2 vias

## Nets (pads, with @x,y where several pads share a name; then routed paths per layer and width w, separated by ;. In a path a pad name is that pad's centre, name@x,y a point inside that pad or via, vN(x,y) a via of type N, cw(c..) or ccw(c..) an arc to the next point about the centre after c; other vN are vias at no path point)
+5: C10.1 C12.2 C14.1 C15.2 F1.1 R5.2 R6.2 U3.7 U4.3 | length 2268.6
  Top Layer w10: F1.1 4661.61,2451.61 4740,2530 U3.7 5113.25,2530 R6.2 5154.78,2571.54 5155.14,2571.54 5161,2577.39 5161,2577.76 5165,2581.75 5165,2625 5140.18,2649.82 R5.2
  Top Layer w30: F1.1 4724.88,2440 C15.2@4729.57,2444.68 ; C15.2 C15.2@4729.57,2444.68 ; C14.1 C15.2@4729.57,2444.68
  Top Layer w40: F1.1 4661.61,2348.39 5038.39,2348.39 5210,2520 5210,2715 5135,2790 4982.72,2942.28 C10.1 4941.18,2942.28 4923.31,2924.41 C12.2 4883.86,2924.41 U4.3
Ant: C3.1 L1.2 U5.ANT U5.GND | length 170.4
  Top Layer w10: 6060.3,2550.3 6060,2550 6060,2509.81 C3.1
  Top Layer w20: L1.2 6060,2550
  Top Layer w40: 6060.3,2550.3 U5.ANT
EXT_RST: C9.1 U1.32 | length 1500.3
  Top Layer w10: C9.1 4640.12,2705.12 v1(4645,2710) ; U1.32 5923.9,2476.1 v1(5930,2470)
  Bottom Layer w10: v1(4645,2710) 4890,2465 5800,2465 5830,2495 5905,2495 v1(5930,2470)
GND: C1.1 C2.1 C3.2 C4.2 C5.2 C6.1 C7.2 C8.2 C10.2 C11.2 C12.1 C13.1 C14.2 C15.1 DS3.2 J1.A1/B12 J1.B1/A12 J1.S1 J1.S2 J1.S3 J1.S4 P1.1 P1.3 P1.5 P1.7 P1.9 P1.11 P1.13 Q1.2 R4.2 R8.2 R9.1 U1.33 U2.4 U3.3 U4.1 Y1.2 Y1.4 | length 364.7
  Top Layer w10: J1.S2 4493.43,2377.4 J1.B1/A12 ; v1(4575.31,2532.23) 4592.77,2549.68 U3.3 ; C2.1 5747.49,2435.41 Y1.2 ; Y1.4 5826.79,2396.04 5848.92,2373.92 C1.1 ; C7.2 5965,2394.37 R4.2
  Top Layer w20: C15.1 4779.69,2395 C14.2
  other v1: 6130,2225 4645,2250 4685,2250 4725,2250 4765,2250 4905,2250 4945,2250 4985,2250 5025,2250 5120,2250 5160,2250 5200,2250 5240,2250 5275,2250 5315,2250 5355,2250 5395,2250 5505,2250 5545,2250 5585,2250 5625,2250 6130,2250 4371.68,2254.19 4270,2255 4295,2255 4320,2255 4345,2255 6130,2275 4371.68,2279.19 4270,2280 4295,2280 4320,2280 4345,2280 4645,2290 4685,2290 4725,2290 4765,2290 4905,2290 4945,2290 4985,2290 5025,2290 5120,2290 5160,2290 5200,2290 5240,2290 5275,2290 5315,2290 5355,2290 5395,2290 5505,2290 5545,2290 5585,2290 5625,2290 6130.81,2301.68 6130,2325 5120,2330 5160,2330 5200,2330 5240,2330 5275,2330 5315,2330 5355,2330 5395,2330 5505,2330 5545,2330 5585,2330 5625,2330 6130,2350 5120,2370 5160,2370 5200,2370 5240,2370 5275,2370 5315,2370 5355,2370 5395,2370 5505,2370 5545,2370 5585,2370 5625,2370 6130,2375 6130,2400 4845,2405 6130.81,2426.68 4845,2430 6130,2595 6130,2620 6130,2645 6130,2670 6130.81,2696.68 6130,2725 6130,2750 6130,2775 6130,2800 6130.81,2826.68 4371.68,2829.19 4270,2830 4295,2830 4320,2830 4345,2830 6130,2850 4371.68,2854.19 4270,2855 4295,2855 4320,2855 4345,2855 6130,2875 4371.68,2879.19 4270,2880 4295,2880 4320,2880 4345,2880 5920,2880 5960,2880 6000,2880 6040,2880 6130,2900 5920,2920 5960,2920 6000,2920 6040,2920 6130,2925 6130.81,2951.68 5920,2960 5960,2960 6000,2960 6040,2960 6130,2975 5920,3000 5960,3000 6000,3000 6040,3000 6130,3000 6130,3025 6130,3050 4920,3075 4960,3075 5000,3075 5040,3075 6130.81,3076.68 6130,3100 4920,3115 4960,3115 5000,3115 5040,3115 6130,3125 6130,3150 6130,3175 6130.81,3201.68 6130,3225 6130,3250 6130,3275 6130,3300 6130.81,3326.68 5980,3330 6020,3330 6130,3355 5980,3370 6020,3370 6130,3380 6130,3405 5980,3410 6020,3410 6130,3430 5980,3450 6020,3450 6130.81,3456.68 6130,3485 6130,3510 6130,3535 6130,3560 6130.81,3586.68 6130,3610 6130,3635 6130,3660 6130,3685
  other v2: 5811.69,2556.69 5855,2556.69 5898.31,2556.69 5811.69,2600 5855,2600 5898.31,2600 5811.69,2643.31 5855,2643.31 5898.31,2643.31
  other v3: 6131.8,2467.63
GPIO0: P1.10 U1.15 | length 516.2
  Top Layer w10: P1.10 5405,2825 5455,2775 5635,2775 5680.79,2729.21 5805.79,2729.21 U1.15
GPIO5: P1.14 U1.24 | length 871
  Top Layer w10: v1(5715,2495) 5751.1,2531.1 U1.24
  Bottom Layer w10: v1(5205,2830) 5205,2765 5230,2740 5295,2740 5305,2730 5320,2730 5340,2710 5340,2520 5355,2505 5529.64,2505 5539.64,2515 5560.36,2515 5575,2500.36 5575,2495 v1(5715,2495)
NetC4_1: C4.1 L1.1 U1.2 | length 121
  Top Layer w10: U1.2 6009.21,2550.79 L1.1 6010,2530 6020,2520 C4.1
NetC9_2: C9.2 U3.4 | length 199.5
  Top Layer w10: C9.2 4620,2650 4655,2615 4655,2530 U3.4
NetDS1_1: DS1.1 R5.1 | length 61.1
  Top Layer w10: DS1.1 5082.89,2707.36 R5.1
NetDS2_1: DS2.1 R6.1 | length 59.6
  Top Layer w10: DS2.1 5083.8,2592.36 R6.1
NetDS3_1: DS3.1 R11.2 | length 67.1
  Top Layer w10: R11.2 4945,2491.34 DS3.1
NetF1_2: F1.2 J1.A4/B9 J1.B4/A9 | length 433.4
  Top Layer w10: 4398.04,2469.96 4439.59,2469.96 4462.62,2469.96 4471.12,2461.45 J1.B4/A9 ; 4430.11,2649.84 4432.52,2641.93 4462.62,2641.93 4471.12,2650.43 J1.A4/B9
  Top Layer w20: 4404.24,2654.26 4408.28,2654.26 4413.99,2648.56 4425.89,2648.56
  Top Layer w30: 4524.67,2461.45 4538.81,2461.45 F1.2@4560.26,2440
  Top Layer w40: 4398.04,2469.96 4398.04,2648.56
  Top Layer w50: F1.2@4560.26,2440 F1.2
NetJ1_A5: J1.A5 R9.2 | length 121
  Top Layer w10: v1(4444.24,2605.16) J1.A5
  Bottom Layer w10: R9.2 4405.68,2605 4440,2605 4440.16,2605.16 v1(4444.24,2605.16)
NetJ1_A6: J1.A6 J1.B6 U3.1 | length 206.2
  Top Layer w10: J1.B6 4526.42,2526.42 4530.79,2530.79 4530.79,2565.79 ; J1.A6 4530.79,2565.79 ; U3.1 4614.06,2590 4555,2590 4530.79,2565.79
NetJ1_A7: J1.A7 J1.B7 U3.2 | length 289.1
  Top Layer w10: J1.A7 4463.36,2546.1 4450,2559.46 v1(4450,2567.23) 4450,2575 4459.25,2584.25 4492.21,2584.25 J1.B7 ; v1(4555.79,2555) 4555.39,2555.39 4569.37,2569.37 U3.2
  Bottom Layer w10: v1(4450,2567.23) 4462.23,2555 4555,2555 v1(4555.79,2555)
NetJ1_B5: J1.B5 R8.1 | length 147.1
  Top Layer w10: v1(4445,2520) 4445,2489.09 4447.05,2487.05 J1.B5
  Bottom Layer w10: R8.1 4435,2530 v1(4445,2520)
NetL2_2: L2.2 U1.3 U1.4 | length 79.9
  Top Layer w10: U1.3 U1.4 5995.91,2590.16 L2.2
NetLS1_1: LS1.1 Q1.3 | length 326.2
  Top Layer w30: Q1.3 5765.76,3292.54 5765.76,3290 LS1.1
NetP1_2: P1.2 U1.9 | length 226.6
  Top Layer w10: P1.2 5815,2865 5923.9,2756.1 U1.9
NetP1_4: P1.4 U1.12 | length 284.6
  Top Layer w10: P1.4 5705,2815 5760,2760 5840,2760 5850,2750 5850,2735 5864.84,2720.16 U1.12
NetP1_6: P1.6 U1.13 | length 353
  Top Layer w10: P1.6 5605,2830 5690,2745 5830,2745 5835,2740 5835,2725 5845.16,2714.84 U1.13
NetP1_8: P1.8 U1.10 | length 702.6
  Top Layer w10: P1.8 5505,2925 5540,2960 5735,2960 5755,2940 5755,2795 5775,2775 5880,2775 5904.21,2750.79 U1.10
NetQ1_1: Q1.1 R2.2 | length 174
  Top Layer w30: Q1.1 5541.69,3461.76 5605,3398.45 R2.2
NetR1_1: R1.1 U2.6 | length 65
  Top Layer w10: U2.6 R1.1
NetR1_2: R1.2 U1.21 | length 69
  Top Layer w10: R1.2 5704.2,2580 5714.35,2590.16 U1.21
NetR2_1: R2.1 U1.16 | length 721.9
  Top Layer w10: R2.1 5624.63,3270.37 v1(5715,3180) ; v1(5720,2695) 5784.61,2695 U1.16
  Bottom Layer w10: v1(5715,3180) 5745,3150 5745,2720 5730,2705 v1(5720,2695)
NetR3_1: R3.1 U1.26 | length 1109.7
  Top Layer w10: R3.1 5007.2,2777.2 v1(5010,2780) ; v1(5285,2705) 5285,2540 5375,2450 5740.86,2450 5741.27,2450.41 5748.47,2450.41 5748.47,2452.35 5754.33,2458.21 5767.77,2458.21 5805.79,2496.22 U1.26
  Bottom Layer w10: v1(5010,2780) 5120,2780 5195,2705 v1(5285,2705)
NetR4_1: R4.1 U1.31 | length 134.2
  Top Layer w10: U1.31 5904.21,2415.79 R4.1
NetR7_1: R7.1 U3.8 | length 136
  Top Layer w10: U3.8 4917.4,2549.68 R7.1
NetR10_1: R10.1 U3.9 | length 206.9
  Top Layer w10: U3.9 4884.37,2569.37 4900,2585 4900,2642.28 R10.1
NetR11_1: R11.1 U3.6 | length 121.7
  Top Layer w10: U3.6 4814.69,2510.31 4825,2500 R11.1
NetU1_18: U1.18 U2.7 | length 174.2
  Top Layer w10: U2.7 5625,2655 5735,2655 5740.79,2649.21 U1.18
NetU1_19: U1.19 U2.3 | length 422
  Top Layer w10: U2.3 5440.87,2629.53 5562.44,2629.53 5562.44,2620.97 5575.22,2608.19 5624.78,2608.19 5656.59,2640 5728.79,2640 5734.57,2634.21 5756.81,2634.21 U1.19
NetU1_20: U1.20 U2.1 | length 399.2
  Top Layer w10: U2.1 v1(5445,2680) ; v1(5700,2615) 5735,2615 5740.16,2609.84 U1.20
  Bottom Layer w10: v1(5445,2680) 5510,2615 v1(5700,2615)
NetU1_22: U1.22 U2.2 | length 510.6
  Top Layer w10: U2.2 5370,2630 5353.78,2613.78 5353.78,2566.22 5365,2555 5689.01,2555 5715,2555 5730.47,2570.47 U1.22
NetU1_23: U1.23 U2.5 | length 170.1
  Top Layer w10: U2.5 5720.71,2530 5736.73,2546.02 5741.5,2550.79 U1.23
U0RX: DS2.2 R7.2 U1.25 | length 1022.4
  Top Layer w10: R7.2 4926.93,2594.65 DS2.2 4998.84,2611.16 v1(4975,2635) ; v1(5550,2490) 5550,2485 5565,2470 5740,2470 5776.5,2506.5 U1.25
  Bottom Layer w10: v1(4975,2635) 5025,2635 5170,2490 v1(5550,2490)
U0TX: DS1.2 R3.2 R10.2 | length 148.4
  Top Layer w10: R3.2 4923.48,2704.23 R10.2 4926.93,2704.65 DS1.2
VCC: C5.1 C6.2 C7.1 C8.1 C11.1 C13.2 L2.1 LS1.2 P1.12 U1.1 U1.7 U1.11 U1.17 U1.29 U1.30 U2.8 U3.10 U4.2 | length 5042.5
  Top Layer w10: C8.1 4773.15,2608.07 U3.10 ; U2.8 5610,2670 5741.21,2670 5742.32,2668.9 U1.17 ; v1(5875,2745) 5884.53,2735.47 U1.11 ; U1.7 5974.21,2649.21
  Top Layer w15: U1.1@5950,2530 5965,2515
  Top Layer w20: v1(5550,2680) U2.8 ; v1(5875,2470) 5875,2510 ; C5.1 5992.82,2740.91 C6.2 v1(6008.71,2685.01) 6008.71,2645 ; C7.1 v1(5965,2475) 5965,2515 ; 5974.21,2649.21 6004.49,2649.21 6008.71,2645 ; L2.1 6008.71,2634.45 6008.71,2645
  Top Layer w40: C11.1 4458.31,2934.41 4585,2934.41 ; v3(4760,2936.1) 4703.31,2879.41 ; 4782.66,2600.28 4782.66,2697.34 4703.31,2776.69 U4.2 4703.31,2879.41 ; LS1.2 5892.11,3489.74 5892.11,3514.43 5864.01,3542.53 4762.53,3542.53 4585,3365 4585,2934.41 ; 4585,2934.41 4648.31,2934.41 4703.31,2879.41
  Bottom Layer w20: v1(5875,2470) 5905,2440 5942.43,2440 5960,2457.57 5960,2470 v1(5965,2475) 5965,2641.3 v1(6008.71,2685.01)
  Bottom Layer w40: v3(4760,2936.1) 5268.9,2936.1 5305,2900 v1(5305,2810) 5420,2810 v1(5550,2680) 5570,2660 5698.43,2660 5703.43,2655 5736.57,2655 5741.57,2660 5770,2660 5771.85,2658.15 5771.85,2659.81 5857.04,2745 v1(5875,2745) 5934.99,2685.01 v1(6008.71,2685.01)
X_IN: C1.2 U1.28 Y1.1 | length 145.9
  Top Layer w10: U1.28 5845.16,2470.16 5824.41,2449.41 Y1.1 5848.23,2435.41 C1.2
X_OUT: C2.2 U1.27 Y1.3 | length 208.6
  Top Layer w10: C2.2 5751.86,2374.66 Y1.3 5773.23,2412.62 5792.14,2412.62 5798,2418.47 5798,2450.7 5805.51,2458.21 5808.21,2458.21 5825.47,2475.47 U1.27
pads on no net: J1. J1.A8 J1.B8 U1.5 U1.6 U1.8 U1.14 U3.5 U4.4

## Polygon pours and split planes (outlines as drawn)
GND on Top Layer "GND_L01_P001" (solid, remove dead copper, pour order 1): 4092.83,3834.2 4082.83,3824.2 4082.83,1999.2 5957.83,1999.2 6142.83,2184.2 6142.83,3029.14 6149.17,3035.49 6149.17,3722.85 6047.83,3824.2
no net on Top Layer "NONET_L01_P002" (solid, pour order 2): 6110,2500 6114.41,2495.59 6142.83,2495.59 6142.83,2439.67 6133.16,2430 6110,2430
GND on Bottom Layer "GND_L02_P000" (solid, pour order 0): 4095,3835 4085,3825 4085,2000 5960,2000 6145,2185 6145,3029.94 6151.35,3036.28 6151.35,3723.65 6050,3825

## Other copper
Top Layer:
  region net GND: 6103.51,2580.56 6130.56,2580.56 6149.17,2599.17 6149.17,3708.25 6106.75,3708.25 6095,3720
  region net GND: 6105,2495 6095,2485 6095,2470 6085,2470 6080,2465 6080,2233.65 6113.65,2200 6140,2200 6140,2425 6150,2435 6150,2490
  pour cut-out: 6255,3720 6255,3880 6405,4030 6320,4115 3650,4115 3650,1890 3935,1605 6285,1605 6285,2115 6200,2200 4285,2200 4210,2275 4210,3610 4320,3720
  region net GND: 6110,2500 6140,2500 6150,2490 6150,2435 6140,2425 6135,2430 6110,2430
Bottom Layer:
  pour cut-out: 6255,3720 6255,3880 6405,4030 6320,4115 3650,4115 3650,1890 3935,1605 6285,1605 6285,2115 6200,2200 4285,2200 4210,2275 4210,3610 4320,3720

## Silkscreen, mask and mechanical layers (free items; w line width, h text height)
Top Overlay:
  drawing of 19 lines, arcs and shapes, not listed
  text "ESP8266 test board" at 4275,3575 h80
  text "made by: @madjogger" at 4270,3513.49 h90
  text "GND" at 4320,3280 h60
  text "GND" at 4585,3280 h60
  text "GND" at 4865,3280 h60
  text "5 VCC 0 12 15 13 14" at 4275,3170 h60
Bottom Overlay:
  drawing of 50 lines, arcs and shapes, not listed
Mechanical 1:
  the board outline again, w10
Bottom Assembly:
  region: 4771.5,3619.32 4771.5,3615.96 4774.86,3615.96 4774.86,3612.61 4778.22,3612.61 4778.22,3599.18 4774.86,3599.18 4774.86,3592.46 4771.5,3592.46 4771.5,3589.11 4768.15,3589.11 4768.15,3585.75 4761.43,3585.75 4761.43,3582.39 4758.08,3582.39 4758.08,3579.04 4751.36,3579.04 4751.36,3575.68 4748,3575.68 4748,3572.32 4741.29,3572.32 4741.29,3568.97 4737.93,3568.97 4737.93,3575.68 4734.58,3575.68 4734.58,3582.39 4731.22,3582.39 4731.22,3589.11 4727.86,3589.11 4727.86,3595.82 4724.51,3595.82 4724.51,3599.18 4721.15,3599.18 4721.15,3605.89 4717.79,3605.89 4717.79,3609.25 4714.44,3609.25 4714.44,3612.61 4717.79,3612.61 4717.79,3615.96 4731.22,3615.96 4731.22,3619.32 4768.15,3619.32

## Text inside footprints (layer, text, board x,y; h text height)
U5: Top Courtyard "Ground Plane" at 6109.04,2865.97 h25.2 r270